# EAGLE board VF_OrdRes_Panel (EAGLE 9.6.2)
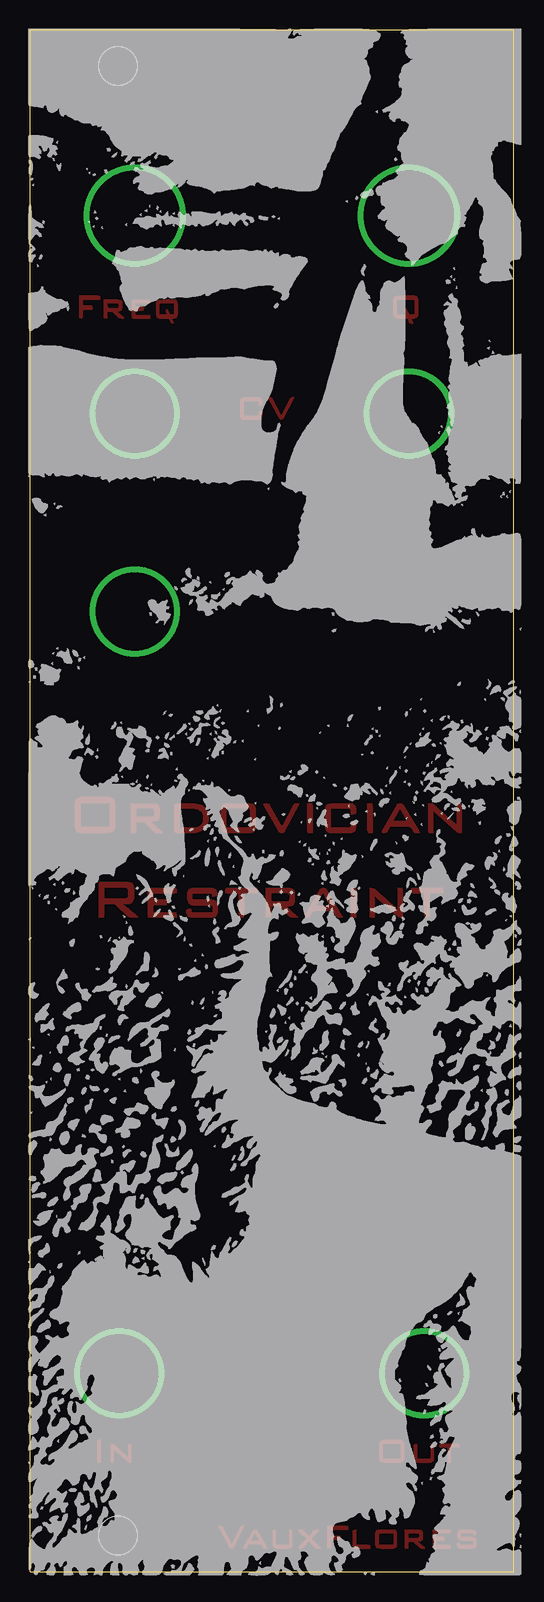
[diagram p0: board, top side]

Size 40.3 x 128.5 mm. Coordinates in mm from the lower left corner, seen from the top.
Copper layers (1*16): Top 0.035mm / dielectric 1.5mm / Bottom 0.035mm
Design rules "default": minimum track width 6mil, minimum drill 0.35mm, track to track 6mil, track to pad 6mil, pad to pad 6mil, via to via 6mil, smd to smd 6mil, copper to edge 40mil, drill to drill 6mil, minimum pad ring 10mil, minimum via ring 8mil, stop-mask expansion 4mil, vias tented up to drill 0mil, thermal gap 10mil
Net classes: 1 power: width 0.61 mm

## Footprints (pad centres in the part's own frame; a part is rotated, then mirrored left to right if it is on the bottom)
EURO_PANEL_8HP = hole 3.2: 7.5,3; 7.5,125.5

## Placement (x,y rotation side)
U$2  [EURO_PANEL_8HP]  -0.17,0 0 top

## Library data of the parts
U$2 = eurohelper

## Tracks (layer width: path | path; a pad name or v marks a point on that pad's centre or on a via)
GND
  pour Top (rank 3): 5.91,9.11 5.91,10.93 5.7,10.93 5.6,10.83 5.6,9.21 5.7,9.11
  pour Top (rank 3): 8.45,9.11 8.45,10.51 8.34,10.6 8.19,10.56 8.19,9.76 8.2,9.56 8.18,9.47 8.04,9.62 6.99,10.55 6.81,10.6 6.72,10.5 6.72,9.29 6.74,9.11 6.94,9.11 6.98,9.26 6.98,10.06 6.97,10.26 7.2,10.04 8.25,9.11
  pour Top (rank 3): 31.2,9.67 31.2,10.46 31.19,10.66 31.11,10.84 30.93,10.92 30.73,10.93 29.53,10.93 29.33,10.91 29.16,10.82 29.1,10.63 29.09,10.43 29.09,9.63 29.1,9.43 29.15,9.24 29.3,9.13 29.5,9.11 30.7,9.11 30.88,9.11 30.89,9.36 29.51,9.36 29.39,9.45 29.39,10.65 29.56,10.68 30.75,10.68 30.9,10.63 30.9,9.43 30.9,9.37 30.91,9.12 31.08,9.17 31.18,9.34 31.2,9.54
  pour Top (rank 3): 33.66,9.46 33.66,10.46 33.6,10.6 33.4,10.6 33.38,10.43 33.38,9.43 33.27,9.33 32.46,9.33 32.28,9.35 32.28,10.55 32.13,10.6 32,10.53 32,9.53 32.01,9.33 32.1,9.16 32.29,9.11 32.49,9.11 33.3,9.11 33.5,9.13 33.63,9.26
  pour Top (rank 3): 35.79,10.38 35.79,10.58 35.61,10.6 34.21,10.6 34.09,10.53 34.14,10.38 34.74,10.38 34.79,10.23 34.79,9.24 34.86,9.11 35.06,9.11 35.08,9.29 35.08,10.29 35.19,10.38
  pour Top (rank 3): 5.84,106.06 5.84,106.26 5.69,106.31 4.3,106.31 4.11,106.3 4.11,104.52 4.28,104.49 4.41,104.56 4.41,105.15 4.54,105.22 5.14,105.22 5.23,105.33 5.17,105.47 4.57,105.47 4.41,105.51 4.41,105.9 4.45,106.06
  pour Top (rank 3): 7.81,104.5 7.22,105.03 7.3,105.08 7.5,105.09 7.65,105.21 7.68,105.4 7.68,105.6 7.67,105.8 7.55,105.95 7.35,105.98 6.36,105.98 6.16,105.98 6.16,104.59 6.26,104.49 6.44,104.51 6.44,104.9 6.47,105.06 6.5,105.29 6.44,105.42 6.44,105.62 6.5,105.77 7.09,105.77 7.29,105.76 7.4,105.62 7.4,105.43 7.3,105.29 7.1,105.28 6.52,105.28 6.49,105.07 6.67,105.07 6.87,105.06 7.44,104.5 7.63,104.49 7.83,104.49
  pour Top (rank 3): 10.01,104.49 10.01,104.69 9.83,104.71 8.84,104.71 8.77,104.84 8.77,105.04 8.86,105.16 9.46,105.16 9.51,105.3 9.39,105.38 8.79,105.38 8.77,105.56 8.77,105.76 8.97,105.76 9.96,105.76 10,105.93 9.85,105.98 8.66,105.98 8.49,105.96 8.49,104.56 8.62,104.49
  pour Top (rank 3): 12.31,105.03 12.31,105.63 12.29,105.83 12.15,105.96 11.96,105.98 10.96,105.98 10.77,105.98 10.58,105.91 10.51,105.73 10.5,105.53 10.5,104.94 10.51,104.74 10.58,104.56 10.75,104.5 10.82,104.73 10.78,104.88 10.78,105.67 10.89,105.76 11.88,105.76 12.03,105.71 12.03,104.72 12.03,104.71 11.83,104.71 11.67,104.77 11.5,105.13 11.36,105.17 11.33,105.03 11.41,104.85 11.42,104.71 10.83,104.71 10.78,104.49 10.96,104.49 11.56,104.49 11.64,104.32 11.72,104.13 11.86,104.04 11.99,104.09 11.82,104.45 11.95,104.49 12.15,104.51 12.29,104.65 12.31,104.84
  pour Top (rank 3): 32.36,105.06 32.36,105.86 32.35,106.05 32.26,106.23 32.08,106.3 31.88,106.31 30.68,106.31 30.49,106.29 30.32,106.19 30.26,106 30.25,105.81 30.25,105.01 30.26,104.81 30.31,104.62 30.47,104.51 30.66,104.49 31.46,104.49 31.62,104.12 31.77,104.04 31.93,104.06 31.76,104.42 31.85,104.49 32.04,104.5 32.05,104.74 31.66,104.74 31.54,104.87 31.37,105.23 31.19,105.18 31.22,105.01 31.3,104.83 31.24,104.74 30.65,104.74 30.55,104.85 30.55,106.04 30.73,106.06 31.93,106.06 32.06,105.99 32.06,104.8 32.06,104.76 32.06,104.5 32.24,104.55 32.34,104.72 32.36,104.92
  pour Top (rank 3): 19.37,96.47 19.37,96.67 19.19,96.73 19.07,96.68 19.07,96.48 19.05,96.3 17.85,96.3 17.8,96.45 17.8,97.45 17.84,97.62 19.04,97.62 19.07,97.45 19.07,97.25 19.22,97.23 19.37,97.31 19.36,97.51 19.33,97.7 19.19,97.83 18.99,97.86 17.99,97.86 17.79,97.86 17.61,97.79 17.52,97.61 17.5,97.42 17.5,96.42 17.54,96.22 17.67,96.08 17.87,96.05 18.07,96.04 18.86,96.04 19.06,96.05 19.25,96.11 19.35,96.28
  pour Top (rank 3): 22.02,97.86 21.82,97.86 21.67,97.77 21.04,96.52 20.95,96.35 20.19,97.77 20.05,97.86 19.85,97.86 19.9,97.72 20.76,96.13 20.91,96.04 21.09,96.09
  pour Top (rank 3): 7.11,62.42 7.11,63.81 7.1,64.01 7.06,64.2 6.96,64.37 6.79,64.47 6.59,64.51 6.39,64.51 4.4,64.51 4.21,64.5 4.3,64.12 6.48,64.12 6.63,64.07 6.63,62.08 6.63,62.01 4.24,62.01 4.22,62.19 4.22,63.98 4.28,64.11 4.19,64.5 4.01,64.45 3.85,64.34 3.77,64.15 3.74,63.96 3.74,63.76 3.74,62.36 3.74,62.16 3.77,61.97 3.84,61.78 4,61.66 4.19,61.61 4.39,61.6 6.38,61.6 6.58,61.61 6.78,61.64 6.95,61.73 7.06,61.9 7.1,62.09 7.11,62.29
  pour Top (rank 3): 10.93,61.71 10.04,62.5 10.13,62.53 10.12,62.87 8.94,62.87 8.84,62.97 8.84,63.57 8.97,63.64 9.97,63.64 10.17,63.64 10.34,63.55 10.37,63.35 10.37,63.15 10.37,63.11 10.32,62.92 10.15,62.87 10.15,62.54 10.34,62.54 10.54,62.56 10.71,62.66 10.8,62.84 10.82,63.04 10.82,63.43 10.81,63.63 10.74,63.82 10.59,63.94 10.4,63.99 10.2,63.99 8.4,63.99 8.39,63.8 8.39,61.61 8.58,61.6 8.78,61.6 8.84,61.74 8.84,62.54 9.44,62.54 9.6,62.44 10.31,61.74 10.45,61.6 11.05,61.6
  pour Top (rank 3): 14.89,62.85 14.87,63.05 14.82,63.25 14.74,63.43 14.63,63.59 14.48,63.73 14.31,63.84 14.13,63.91 13.93,63.96 13.73,63.98 13.53,63.99 13.34,63.99 13.39,63.64 13.58,63.63 13.78,63.61 13.97,63.56 14.15,63.47 14.3,63.33 14.39,63.16 14.43,62.96 14.44,62.81 14.43,62.61 14.38,62.41 14.28,62.24 14.13,62.11 13.94,62.03 13.75,61.99 13.55,61.97 13.34,61.96 12.54,61.96 12.49,62.11 12.49,63.52 12.57,63.64 13.36,63.64 13.31,63.99 12.12,63.99 12.04,63.88 12.04,61.66 12.18,61.6 13.38,61.6 13.58,61.6 13.78,61.62 13.98,61.66 14.17,61.71 14.36,61.79 14.53,61.9 14.67,62.05 14.77,62.22 14.84,62.4 14.88,62.6 14.89,62.8
  pour Top (rank 3): 18.81,62.21 18.81,63.41 18.8,63.61 18.74,63.8 18.59,63.93 18.4,63.98 18.2,63.99 16.6,63.99 16.4,63.99 16.21,63.96 16.03,63.87 15.94,63.7 15.91,63.5 15.91,63.3 15.91,62.1 15.93,61.9 16.02,61.73 16.19,61.63 16.39,61.6 16.59,61.6 18.19,61.6 18.37,61.61 18.34,61.96 16.36,61.96 16.36,63.56 16.48,63.64 18.28,63.64 18.36,63.51 18.36,62.11 18.36,61.97 18.4,61.61 18.58,61.65 18.73,61.78 18.79,61.97 18.81,62.16
  pour Top (rank 3): 22.46,63.99 22.06,63.99 21.94,63.86 21,62.1 20.91,62.21 19.94,63.95 19.76,63.99 19.56,63.99 19.45,63.94 20.75,61.7 20.89,61.6 21.09,61.6 21.21,61.72
  pour Top (rank 3): 23.57,61.6 23.57,63.83 23.52,63.99 23.12,63.99 23.12,61.76 23.16,61.6
  pour Top (rank 3): 27.18,62.16 27.18,62.37 27.06,62.47 26.86,62.51 26.73,62.47 26.73,62.07 26.63,61.96 25.23,61.96 25.06,61.99 25.06,63.6 25.21,63.64 26.62,63.64 26.73,63.54 26.73,63.14 26.91,63.15 27.1,63.19 27.18,63.32 27.17,63.52 27.14,63.72 27.03,63.89 26.85,63.97 26.65,63.99 25.25,63.99 25.05,63.99 24.85,63.95 24.69,63.83 24.62,63.65 24.6,63.45 24.6,62.24 24.61,62.04 24.65,61.84 24.76,61.68 24.95,61.62 25.15,61.6 26.55,61.6 26.75,61.61 26.95,61.65 27.1,61.78 27.16,61.96
  pour Top (rank 3): 28.57,61.6 28.57,63.83 28.53,63.99 28.12,63.99 28.12,61.76 28.17,61.6
  pour Top (rank 3): 32.44,61.68 31.12,63.9 30.98,63.99 30.79,63.99 30.87,63.62 31.44,62.6 31.49,62.5 30.3,62.5 30.28,62.61 30.76,63.48 30.85,63.63 30.77,63.99 30.62,63.92 29.33,61.69 29.37,61.6 29.57,61.6 29.75,61.64 29.94,61.99 30.04,62.16 31.62,62.16 31.75,62.04 31.95,61.69 32.09,61.6 32.49,61.6
  pour Top (rank 3): 35.97,61.6 35.97,63.81 35.95,63.99 35.75,63.99 35.55,63.99 35.55,62.58 35.56,62.38 35.58,62.18 35.52,62.2 35.38,62.35 35.24,62.49 33.58,63.96 33.39,63.99 33.2,63.98 33.2,61.77 33.24,61.6 33.44,61.6 33.62,61.62 33.62,63.03 33.62,63.23 33.6,63.43 33.65,63.42 33.79,63.27 33.93,63.13 35.59,61.66 35.77,61.6
  pour Top (rank 3): 8.96,54.55 7.74,55.59 7.71,55.67 7.77,56.06 6.38,56.06 6.21,56.08 6.21,56.88 6.21,57.08 7.82,57.08 8.02,57.06 8.17,56.94 8.19,56.75 8.19,56.55 8.19,56.36 8.15,56.16 7.99,56.07 7.8,56.06 7.72,55.68 7.91,55.68 8.11,55.69 8.31,55.71 8.49,55.78 8.62,55.93 8.68,56.12 8.68,56.32 8.68,56.93 8.65,57.12 8.56,57.3 8.39,57.41 8.2,57.45 8,57.46 5.79,57.46 5.72,57.33 5.72,54.72 5.75,54.54 6.15,54.54 6.21,54.69 6.21,55.49 6.22,55.68 7.02,55.68 7.18,55.57 8.19,54.6 8.37,54.54 8.97,54.54
  pour Top (rank 3): 12.25,54.54 12.25,54.74 12.2,54.89 10.41,54.89 10.27,54.95 10.27,55.55 10.41,55.61 11.4,55.61 11.45,55.76 11.45,55.96 11.25,55.97 10.46,55.97 10.27,55.98 10.27,56.58 10.46,56.58 12.05,56.58 12.23,56.61 12.23,56.81 12.16,56.94 9.97,56.94 9.82,56.89 9.82,54.7 9.86,54.54
  pour Top (rank 3): 15.64,55.11 15.64,55.31 15.64,55.51 15.6,55.7 15.49,55.86 15.31,55.94 15.11,55.96 13.72,55.96 13.53,55.97 13.53,56.57 13.71,56.58 15.1,56.58 15.2,56.48 15.2,56.29 15.38,56.31 15.57,56.35 15.61,56.51 15.56,56.71 15.44,56.86 15.25,56.92 15.05,56.94 13.66,56.94 13.46,56.92 13.27,56.85 13.16,56.69 13.12,56.5 13.11,56.3 13.12,56.1 13.14,55.9 13.21,55.72 13.38,55.62 13.58,55.58 13.78,55.58 15.17,55.58 15.24,55.44 15.24,55.05 15.18,54.91 13.58,54.91 13.43,54.95 13.43,55.15 13.34,55.24 13.15,55.2 13.02,55.11 13.04,54.91 13.09,54.72 13.24,54.6 13.43,54.55 13.63,54.54 15.03,54.54 15.22,54.55 15.42,54.6 15.57,54.72 15.63,54.91
  pour Top (rank 3): 18.97,56.58 18.97,56.78 18.93,56.94 16.32,56.94 16.26,56.8 16.26,56.6 16.44,56.58 17.24,56.58 17.38,56.53 17.38,54.73 17.4,54.54 17.8,54.54 17.84,54.71 17.84,56.52 17.97,56.58
  pour Top (rank 3): 22.2,54.65 21.3,55.45 21.39,55.48 21.38,55.82 20.2,55.81 20.1,55.92 20.1,56.52 20.23,56.59 21.23,56.59 21.43,56.59 21.6,56.49 21.63,56.3 21.63,56.1 21.63,56.06 21.58,55.87 21.41,55.82 21.42,55.48 21.6,55.49 21.8,55.51 21.97,55.61 22.06,55.78 22.08,55.98 22.08,56.38 22.07,56.58 22,56.76 21.85,56.89 21.66,56.93 21.46,56.94 19.66,56.94 19.65,56.75 19.65,54.55 19.84,54.54 20.04,54.54 20.1,54.68 20.1,55.48 20.7,55.48 20.86,55.38 21.57,54.68 21.72,54.54 22.31,54.54
  pour Top (rank 3): 26,54.63 24.68,56.85 24.53,56.94 24.35,56.94 24.42,56.57 25,55.54 25.05,55.45 23.86,55.45 23.84,55.55 24.32,56.42 24.41,56.57 24.32,56.93 24.17,56.87 22.88,54.63 22.93,54.54 23.13,54.54 23.3,54.58 23.49,54.93 23.59,55.1 25.18,55.1 25.31,54.98 25.5,54.64 25.65,54.54 26.04,54.54
  pour Top (rank 3): 27.2,54.54 27.2,56.78 27.16,56.93 26.75,56.93 26.75,54.7 26.8,54.54
  pour Top (rank 3): 31.06,54.54 31.06,56.76 31.04,56.94 30.84,56.94 30.64,56.93 30.64,55.52 30.65,55.32 30.67,55.12 30.61,55.15 30.47,55.3 30.32,55.44 28.67,56.91 28.48,56.94 28.29,56.93 28.29,54.71 28.33,54.54 28.53,54.54 28.71,54.56 28.71,55.97 28.71,56.17 28.69,56.37 28.74,56.36 28.87,56.21 29.02,56.07 30.68,54.61 30.86,54.54
  pour Top (rank 3): 34.45,56.58 34.45,56.78 34.4,56.94 31.8,56.94 31.73,56.8 31.73,56.6 31.91,56.58 32.71,56.58 32.86,56.53 32.86,54.73 32.88,54.54 33.28,54.54 33.31,54.71 33.31,56.52 33.45,56.58
  pour Top (rank 3): 17.87,3.78 17.67,3.78 17.53,3.68 16.89,2.43 16.8,2.26 16.05,3.68 15.9,3.78 15.7,3.78 15.75,3.63 16.62,2.04 16.77,1.95 16.94,2
  pour Top (rank 3): 19.68,2.1 18.97,3.3 18.86,3.45 18.66,3.45 18.54,3.31 17.84,2.1 17.79,1.95 17.99,1.95 18.11,2.08 18.21,2.26 18.38,2.3 19.16,2.3 19.13,2.52 18.55,2.52 18.35,2.52 18.74,3.22 18.84,3.07 19.13,2.55 19.14,2.53 19.19,2.3 19.32,2.21 19.42,2.03 19.57,1.95 19.77,1.95
  pour Top (rank 3): 21.87,2.31 21.87,3.31 21.81,3.45 21.61,3.45 21.59,3.27 21.59,2.27 21.48,2.18 20.68,2.18 20.5,2.2 20.5,3.4 20.34,3.45 20.21,3.38 20.21,2.38 20.22,2.18 20.32,2.01 20.51,1.96 20.71,1.95 21.51,1.95 21.71,1.98 21.85,2.11
  pour Top (rank 3): 24.25,1.95 23.53,2.64 23.43,2.78 23.98,3.34 24.05,3.45 23.85,3.45 23.68,3.38 23.28,2.94 23.14,3.01 22.73,3.44 22.53,3.45 22.33,3.45 22.47,3.32 23.04,2.77 23,2.63 22.45,2.06 22.39,1.95 22.59,1.95 22.76,2.02 23.15,2.46 23.29,2.52 23.85,1.96
  pour Top (rank 3): 26.52,3.53 26.52,3.73 26.37,3.78 24.98,3.78 24.79,3.77 24.79,1.98 24.96,1.95 25.09,2.02 25.09,2.62 25.22,2.69 25.82,2.69 25.91,2.79 25.85,2.93 25.25,2.93 25.09,2.97 25.09,3.37 25.13,3.53
  pour Top (rank 3): 28.36,1.95 28.36,2.16 28.18,2.18 27.36,2.18 27.19,2.21 27.19,3.43 27.01,3.45 26.91,3.35 26.91,2.13 26.94,1.95
  pour Top (rank 3): 30.58,2.49 30.58,3.09 30.55,3.28 30.42,3.42 30.23,3.45 29.23,3.45 29.03,3.45 28.85,3.38 28.77,3.2 28.76,3 28.76,2.41 28.77,2.21 28.84,2.03 29.01,1.96 29.1,2.19 29.05,2.32 29.05,3.12 29.14,3.23 30.13,3.23 30.29,3.19 30.29,2.2 30.29,2.18 29.11,2.18 29.04,1.96 29.22,1.95 30.22,1.95 30.41,1.98 30.55,2.11 30.58,2.31
  pour Top (rank 3): 32.88,1.97 32.29,2.5 32.37,2.54 32.57,2.55 32.72,2.67 32.75,2.87 32.75,3.06 32.74,3.26 32.62,3.41 32.42,3.45 31.43,3.45 31.23,3.45 31.23,2.05 31.33,1.95 31.51,1.97 31.51,2.37 31.54,2.53 31.57,2.76 31.51,2.89 31.51,3.08 31.56,3.23 32.16,3.23 32.36,3.23 32.47,3.08 32.47,2.9 32.37,2.75 32.17,2.75 31.59,2.75 31.55,2.54 31.74,2.54 31.93,2.53 32.5,1.97 32.7,1.95 32.9,1.95
  pour Top (rank 3): 35.08,1.95 35.08,2.15 34.9,2.17 33.9,2.17 33.84,2.31 33.84,2.51 33.93,2.62 34.53,2.62 34.58,2.77 34.46,2.84 33.86,2.84 33.84,3.02 33.84,3.22 34.04,3.23 35.03,3.23 35.07,3.39 34.92,3.45 33.73,3.45 33.56,3.42 33.56,2.03 33.69,1.95
  pour Top (rank 3): 37.2,2.31 37.2,2.51 37.17,2.7 37.02,2.82 36.82,2.84 36.02,2.84 35.88,2.9 35.88,3.1 35.95,3.23 36.74,3.23 36.93,3.21 36.94,3.03 37.14,3.08 37.17,3.24 37.06,3.4 36.87,3.45 36.07,3.45 35.87,3.44 35.69,3.37 35.62,3.19 35.62,2.99 35.64,2.79 35.75,2.64 35.95,2.6 36.95,2.6 36.95,2.2 36.77,2.18 35.97,2.18 35.82,2.23 35.79,2.4 35.6,2.36 35.57,2.19 35.65,2.01 35.84,1.96 36.04,1.95 36.84,1.95 37.04,1.98 37.17,2.11
N$22  (via drill 7.5)
  other vias: 8.72,113.03
N$23  (via drill 7.5)
  other vias: 31.58,113.03
N$24  (via drill 6.5)
  other vias: 8.72,96.52
N$25  (via drill 6.5)
  other vias: 31.58,96.52
N$26  (via drill 6.5)
  other vias: 7.45,16.51
N$27  (via drill 6.5)
  other vias: 32.85,16.51
N$28  (via drill 6.5)
  other vias: 8.72,80.01